# EAGLE board Schematic1_projectTSC v38 (EAGLE 9.7.0)
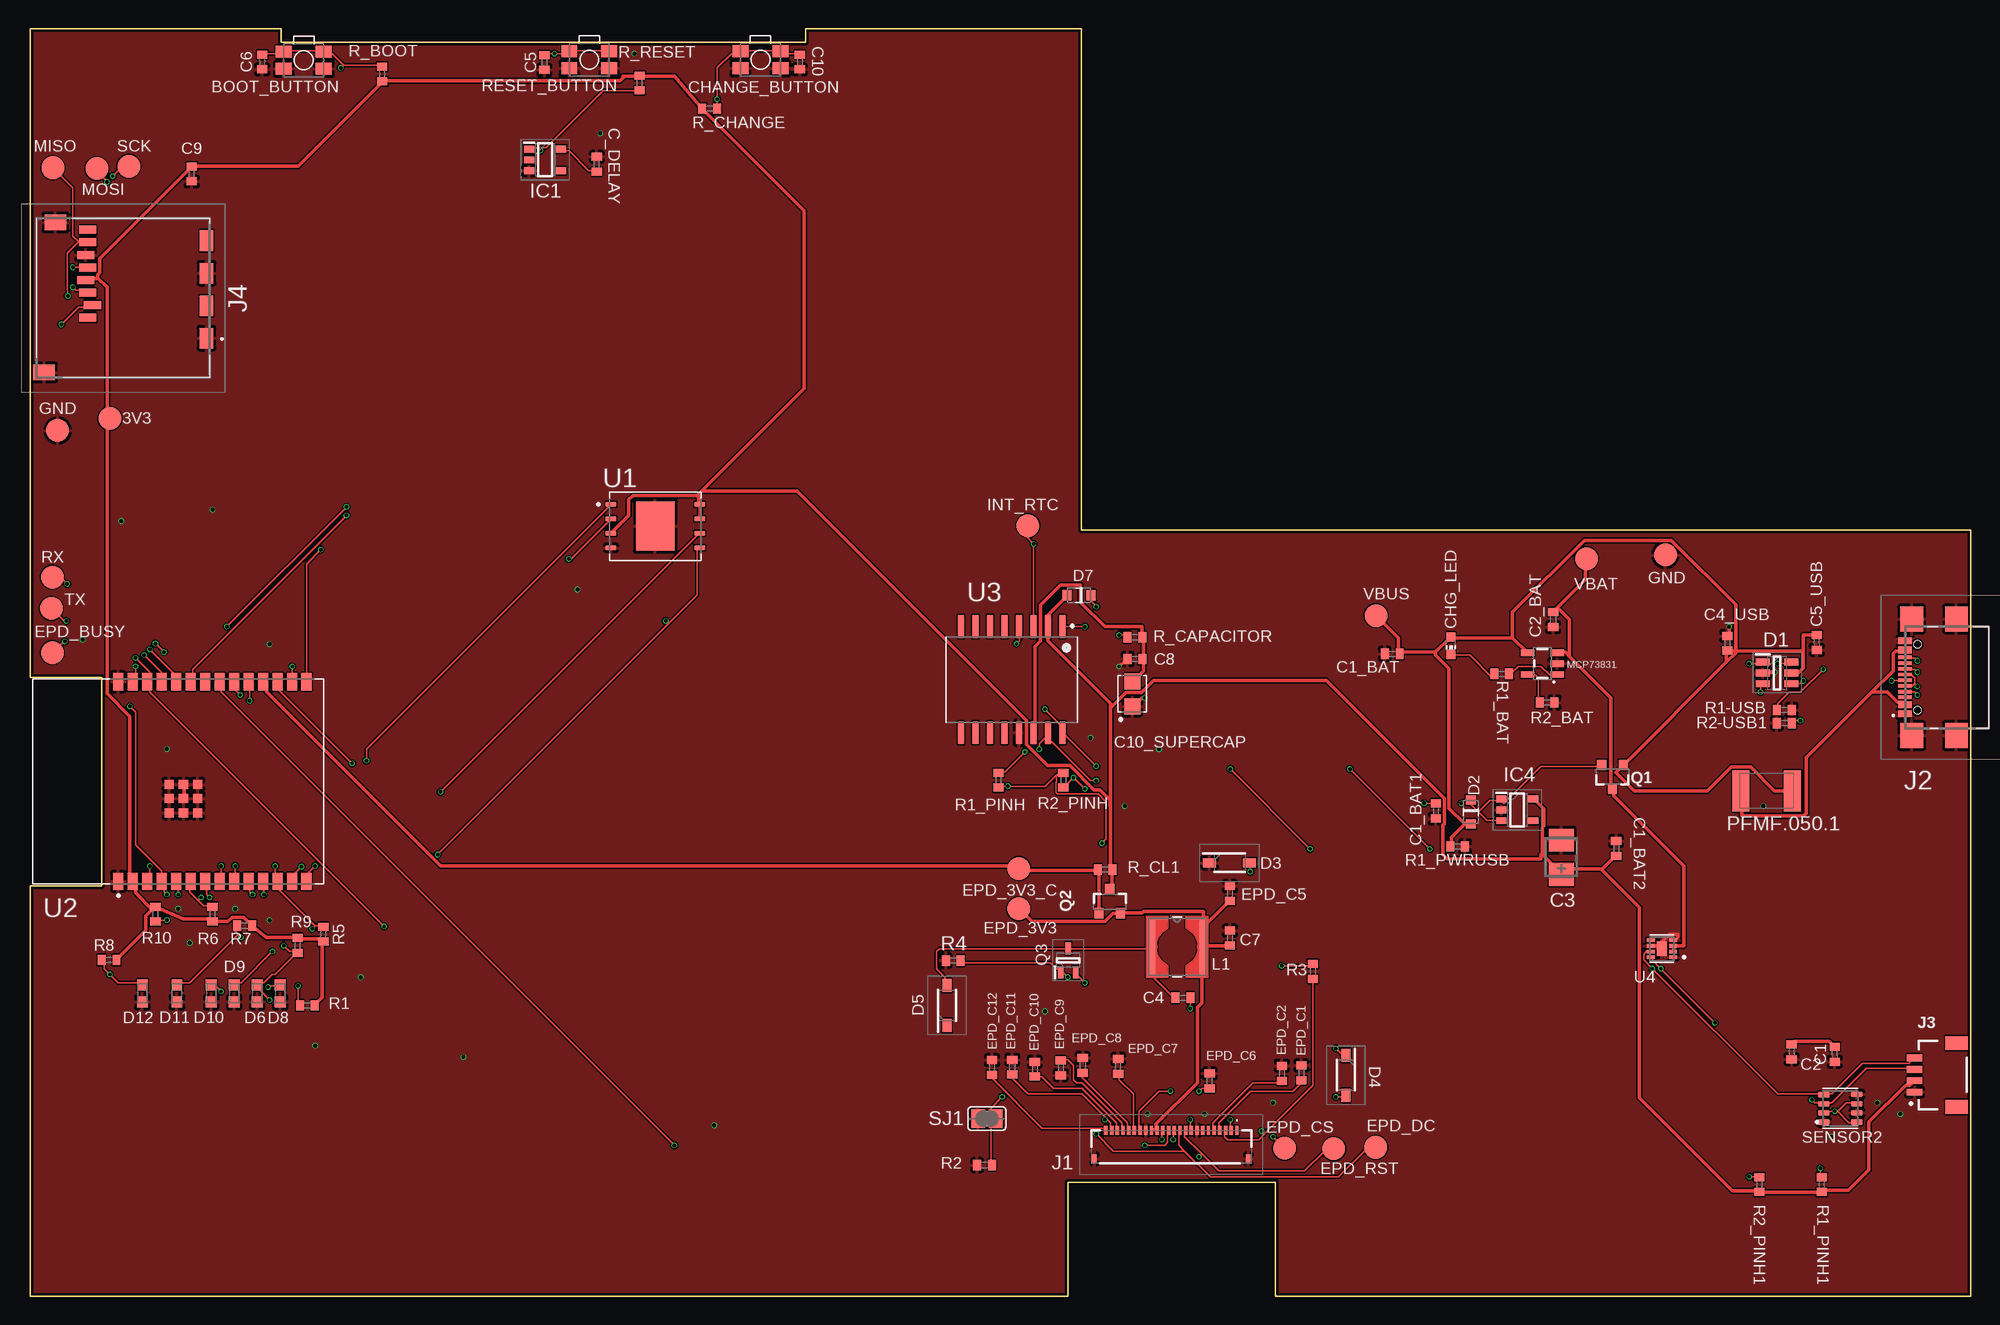
[diagram p0: board, top side]
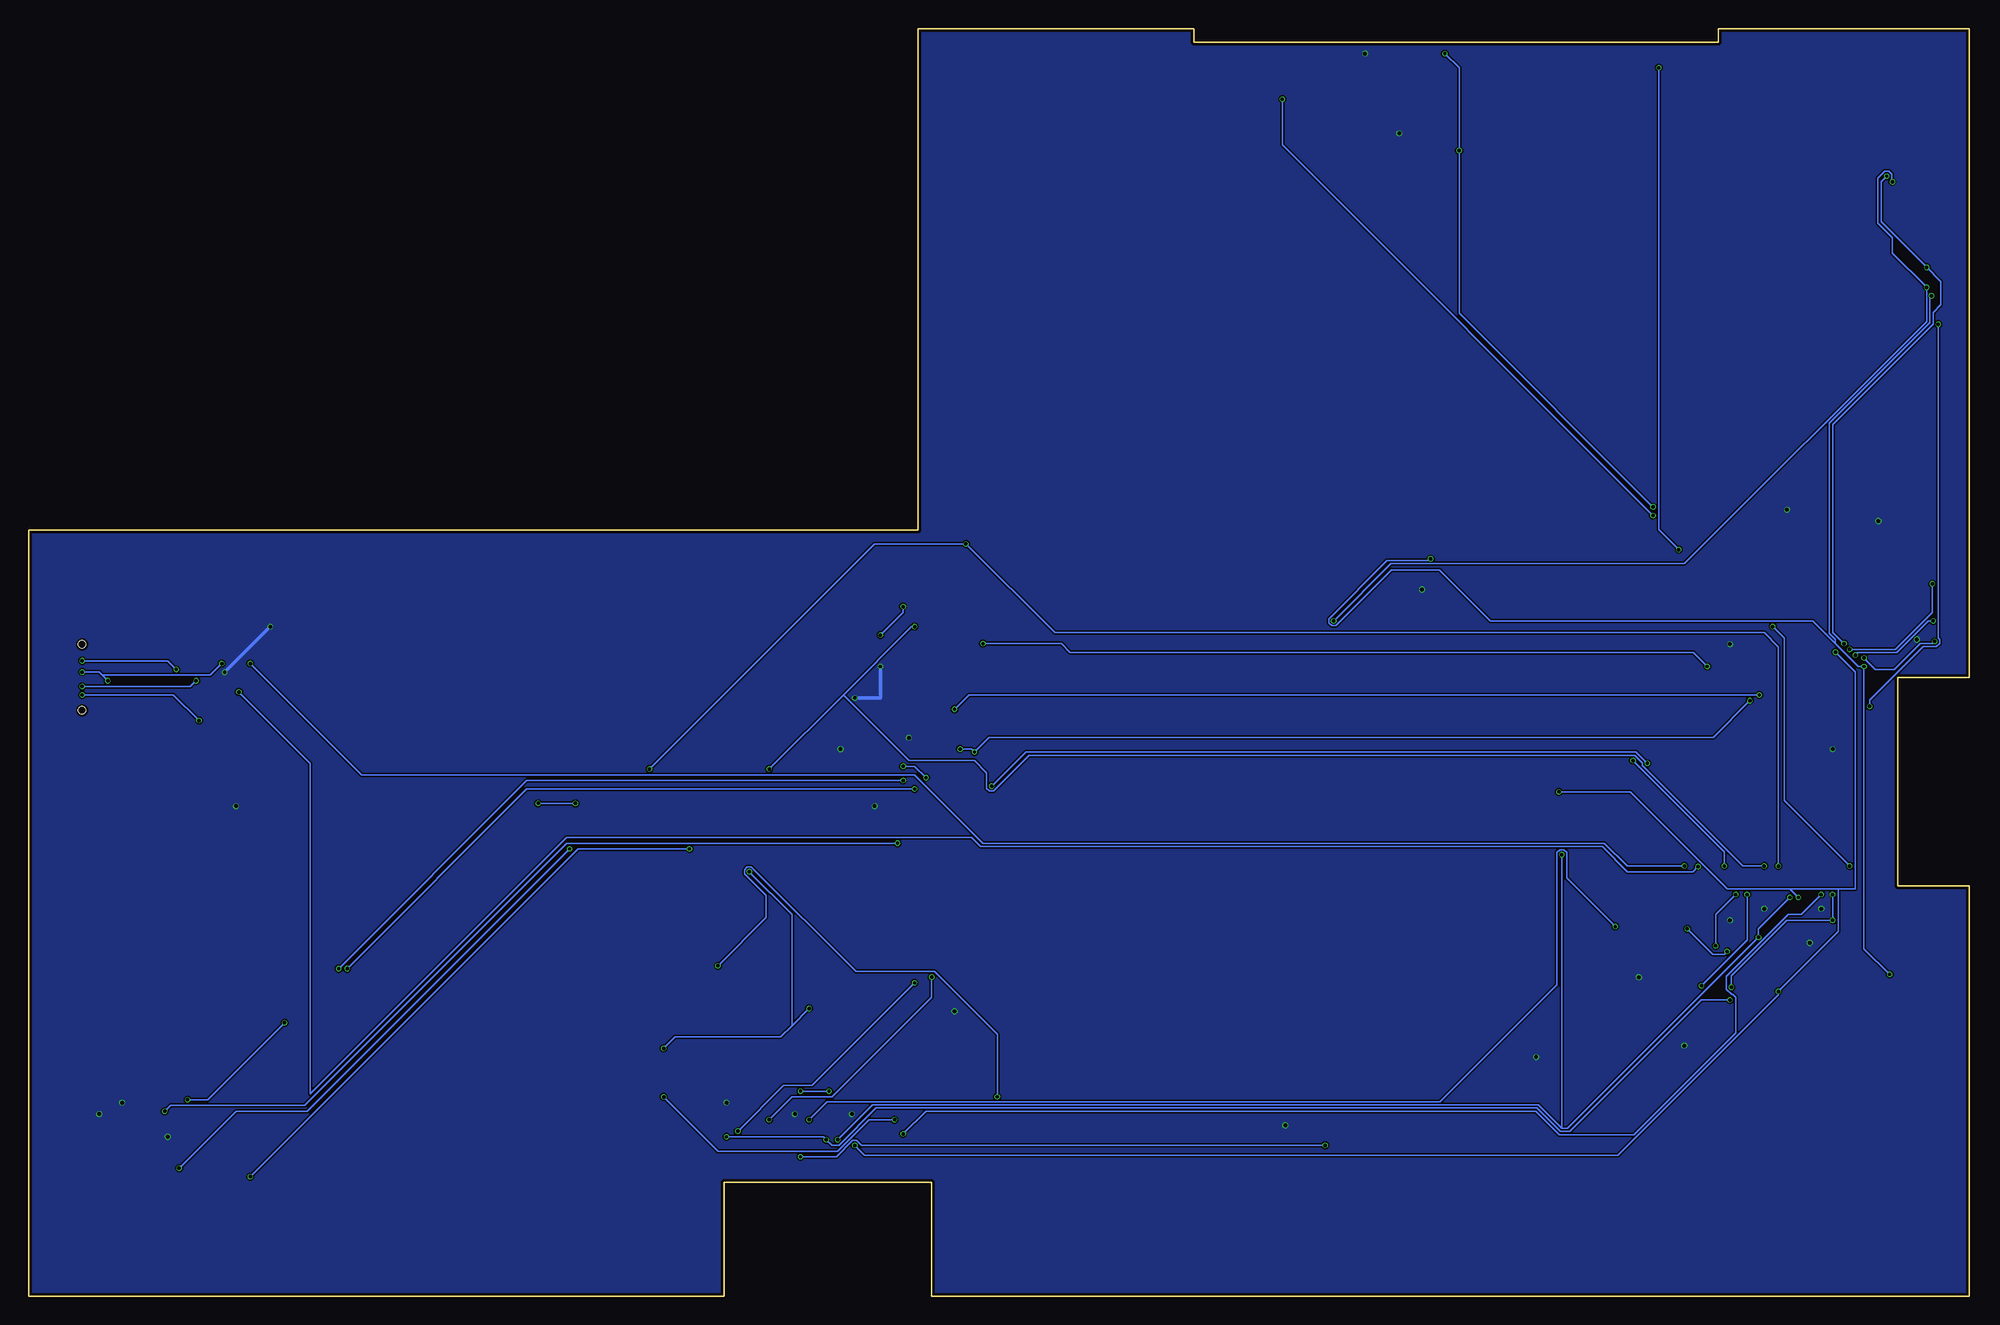
[diagram p1: board, bottom side, seen from below]

Size 170.2 x 111.2 mm. Coordinates in mm from the lower left corner, seen from the top.
Outline: 0,36 0,0 91,0 91,10 109.2,10 109.2,0 170.2,0 170.2,67.2 92.2,67.2 92.2,111.2 68,111.2 68,110 22.04,110 22.04,111.2 0,111.2 0,54.29 6.28,54.29 6.28,36 0,36
Copper layers (1*16): Top 0.035mm / dielectric 1.6mm / Bottom 0.035mm
Design rules "jlcpcb-2layers *": minimum track width 0.15mm, minimum drill 0.3mm, track to track 5mil, track to pad 5mil, pad to pad 5mil, via to via 5mil, smd to smd 5mil, copper to edge 0.2mm, drill to drill 6mil, minimum pad ring 10mil, minimum via ring 3mil, stop-mask expansion 4mil, vias tented up to drill 0mil, thermal gap 10mil
Net classes: 1 PWR: width 0.3 mm

## Footprints (pad centres in the part's own frame; a part is rotated, then mirrored left to right if it is on the bottom)
MYBUTTON = smd 1.4 x 1.05: 1 1.75,0.75; 2 -1.75,0.75; 3 -1.75,-0.75; 4 1.75,-0.75
EAGLE-LTSPICE_C0402 = smd 0.7 x 0.9: 1 -0.65,0; 2 0.65,0
RCL_CT3528 = smd 2 x 2.2: + -1.5,0; - 1.5,0
CAPCP3225X100N = smd 1.4 x 1.4: 1 -1.1,0; 2 1.1,0
ADAFRUIT_CHIP-LED0603 = smd 0.8 x 0.8: A 0,-0.75; C 0,0.75
SOT95P280X145-6N = smd 1.2 x 0.6: 1 -1.25,0.95; 2 -1.25,0; 3 -1.25,-0.95; 4 1.25,-0.95; 5 1.25,0; 6 1.25,0.95
ESP32_WROVER_AVX---SD0805S020S1R0_AVX_SD0805S020S1R0_0 = smd 0.8 x 0.9: 1 -1.05,0; 2 1.05,0
SOD3716X135N = smd 1.15 x 0.8: 1 -1.75,0; 2 1.75,0
DIOC1608X36N = smd 0.97 x 0.94: 1 -0.75,0; 2 0.75,0
SOT95P280X125-5N = smd 0.9 x 0.6: 1 -1.4,0.95; 2 -1.4,0; 3 -1.4,-0.95; 4 1.4,-0.95; 5 1.4,0.95
SOT95P280X120-5N = smd 0.9 x 0.6: 1 -1.4,0.95; 2 -1.4,0; 3 -1.4,-0.95; 4 1.4,-0.95; 5 1.4,0.95
FH34SRJ24S05SH99 = smd 0.3 x 0.8: 1 5.75,1.45; 2 5.25,1.45; 3 4.75,1.45; 4 4.25,1.45; 5 3.75,1.45; 6 3.25,1.45; 7 2.75,1.45; 8 2.25,1.45; 9 1.75,1.45; 10 1.25,1.45; 11 0.75,1.45; 12 0.25,1.45; 13 -0.25,1.45; 14 -0.75,1.45; 15 -1.25,1.45; 16 -1.75,1.45; 17 -2.25,1.45; 18 -2.75,1.45; 19 -3.25,1.45; 20 -3.75,1.45; 21 -4.25,1.45; 22 -4.75,1.45; 23 -5.25,1.45; 24 -5.75,1.45 | smd 0.4 x 0.8: MP1 6.75,-1.05; MP2 -6.75,-1.05
SAMACSYS_PARTS_USB4110GFA = smd 0.3 x 1.15: A1 -3.35,3.678; A4 -2.55,3.678; A5 -1.25,3.678; A6 -0.25,3.678; A7 0.25,3.678; A8 1.25,3.678; A9 2.55,3.678; A12 3.35,3.678; B1 3.05,3.678; B4 2.25,3.678; B5 1.75,3.678; B6 0.75,3.678; B7 -0.75,3.678; B8 -1.75,3.678; B9 -2.25,3.678; B12 -3.05,3.678 | smd 2.18 x 2: MP1 -5.11,-0.827; MP2 5.11,-0.827; MP3 -5.11,3.103; MP4 5.11,3.103 | hole 0.65: -2.89,2.603; 2.89,2.603
JST04_1MM_RA = smd 0.6 x 1.35: 1 -1.5,0; 2 -0.5,0; 3 0.5,0; 4 1.5,0 | smd 1.2 x 2: NC1 2.8,-3.675; NC2 -2.8,-3.675
112ATAARR03ATTEND = smd 1.8 x 1.2: G1 10.6,10.4; G2 4.9,10.4; S1 7.75,10.4; S2 2.05,10.4 | smd 1.4 x 1.9: G3 13.6,-3.85; G4 0.45,-2.85 | smd 0.7 x 1.5: P1 8.8,0; P2 7.7,0.4; P3 6.6,0; P4 5.5,-0.2; P5 4.4,0; P6 3.3,-0.2; P7 2.2,0; P8 1.1,0
IND_4828-WE-TPC_WRE = smd 0.635 x 4.826: 1 -2.286,0; 2 2.286,0
ESP32_WROVER_SPARKFUN-IC-POWER_SOT23-5 = smd 0.55 x 1.2: 1 -0.95,-1.3; 2 0,-1.3; 3 0.95,-1.3; 4 0.95,1.3; 5 -0.95,1.3
ESP32C6_VARISTOR_CT/CN1812 = smd 1.5 x 3.6: 1 -2.25,0; 2 2.25,0
ESP32_WROVER_SPARKFUN-DISCRETESEMI_SOT23-3 = smd 0.8 x 0.9: 1 -0.95,-1; 2 0.95,-1; 3 0,1.1
SOT65P210X110-3N = smd 1.05 x 0.5: 1 -1.05,0.65; 2 -1.05,-0.65; 3 1.05,0
ESP32_WROVER_EAGLE-LTSPICE_R0402 = smd 0.7 x 0.9: 1 -0.65,0; 2 0.65,0
ESP32_WROVER_BME680_PSON80P300X300X100-8N = smd 1.016 x 0.5: 1 1.458,1.2; 2 1.458,0.4; 3 1.458,-0.4; 4 1.458,-1.2; 5 -1.458,-1.22; 6 -1.458,-0.4; 7 -1.458,0.4; 8 -1.458,1.2
SJ = smd 1.168 x 1.6: 1 -0.762,0; 2 0.762,0
TP20R = smd 2 x 2: TP 0,0
SON127P600X800X80-9N = smd 0.94 x 0.44: 1 -3.895,1.905; 2 -3.895,0.635; 3 -3.895,-0.635; 4 -3.895,-1.905; 5 3.895,-1.905; 6 3.895,-0.635; 7 3.895,0.635; 8 3.895,1.905 | smd 3.4 x 4.3: 9 0,0
XCVR_ESP32-C6-WROOM-1-N8 = smd 1.5 x 0.9: 1 -8.75,5.26; 2 -8.75,3.99; 3 -8.75,2.72; 4 -8.75,1.45; 5 -8.75,0.18; 6 -8.75,-1.09; 7 -8.75,-2.36; 8 -8.75,-3.63; 9 -8.75,-4.9; 10 -8.75,-6.17; 11 -8.75,-7.44; 12 -8.75,-8.71; 13 -8.75,-9.98; 14 -8.75,-11.25; 15 8.75,-11.25; 16 8.75,-9.98; 17 8.75,-8.71; 18 8.75,-7.44; 19 8.75,-6.17; 20 8.75,-4.9; 21 8.75,-3.63; 22 8.75,-2.36; 23 8.75,-1.09; 24 8.75,0.18; 25 8.75,1.45; 26 8.75,2.72; 27 8.75,3.99; 28 8.75,5.26 | smd 0.8 x 0.8: 29_1 -2.755,0.79; 29_2 -1.505,0.79; 29_3 -0.255,0.79; 29_4 -2.755,-0.46; 29_5 -1.505,-0.46; 29_6 -0.255,-0.46; 29_7 -2.755,-1.71; 29_8 -1.505,-1.71; 29_9 -0.255,-1.71
SOIC127P1032X265-16N = smd 2.05 x 0.59: 1 -4.655,4.445; 2 -4.655,3.175; 3 -4.655,1.905; 4 -4.655,0.635; 5 -4.655,-0.635; 6 -4.655,-1.905; 7 -4.655,-3.175; 8 -4.655,-4.445; 9 4.655,-4.445; 10 4.655,-3.175; 11 4.655,-1.905; 12 4.655,-0.635; 13 4.655,0.635; 14 4.655,1.905; 15 4.655,3.175; 16 4.655,4.445
SON50P200X200X80-9N = smd 0.76 x 0.31: 1 -0.985,0.75; 2 -0.985,0.25; 3 -0.985,-0.25; 4 -0.985,-0.75; 8 0.985,0.75 | smd 0.762 x 0.31: 5 0.985,-0.75; 6 0.985,-0.25; 7 0.985,0.25 | smd 0.9 x 1.3: 9 0,0

## Placement (x,y rotation side)
BOOT_BUTTON  BUTTON_CUSYOMV1  [MYBUTTON]  24,108.41 180 top
C1  100nF  [EAGLE-LTSPICE_C0402]  158.26,21.25 270 top
C1_BAT  4.7uF  [EAGLE-LTSPICE_C0402]  119.45,56.36 180 top
C1_BAT1  4.7uF  [EAGLE-LTSPICE_C0402]  123.28,42.57 270 top
C1_BAT2  4.7uF  [EAGLE-LTSPICE_C0402]  139.09,39.28 90 top
C2  100nF  [EAGLE-LTSPICE_C0402]  154.47,21.46 270 top
C2_BAT  4.7uF  [EAGLE-LTSPICE_C0402]  133.56,59.36 270 top
C3  100uF  [RCL_CT3528]  134.26,38.52 90 top
C4  4.7uF/25V  [EAGLE-LTSPICE_C0402]  101.09,26.2 180 top
C4_USB  100nF  [EAGLE-LTSPICE_C0402]  148.83,57.28 90 top
C5  1uF  [EAGLE-LTSPICE_C0402]  45.11,108.22 270 top
C5_USB  4.7uF  [EAGLE-LTSPICE_C0402]  156.68,57.36 270 top
C6  100nF  [EAGLE-LTSPICE_C0402]  20.36,108.26 270 top
C7  10uF  [EAGLE-LTSPICE_C0402]  105.21,31.44 90 top
C8  100nF  [EAGLE-LTSPICE_C0402]  96.88,55.9 0 top
C9  100nF  [EAGLE-LTSPICE_C0402]  14.18,98.44 270 top
C10  100nF  [EAGLE-LTSPICE_C0402]  67.5,108.26 270 top
C10_SUPERCAP  CPH3225A  [CAPCP3225X100N]  96.66,52.85 90 top
C_DELAY  100nF  [EAGLE-LTSPICE_C0402]  49.7,99.31 90 top
CHANGE_BUTTON  BUTTON_CUSYOMV1  [MYBUTTON]  64.05,108.45 180 top
CHG_LED  [ADAFRUIT_CHIP-LED0603]  124.6,57.07 180 top
D1  USBLC6-2SC6Y  [SOT95P280X145-6N]  153.2,54.68 0 top
D2  ESP32_WROVER_AVX---SD0805S020S1R0_AVX_SD0805S020S1R0_0_0AVX_SD0805S020S1R0_0_0  [ESP32_WROVER_AVX---SD0805S020S1R0_AVX_SD0805S020S1R0_0]  126.34,42.49 270 top
D3  MBR0530  [SOD3716X135N]  105.18,38.03 0 top
D4  MBR0530  [SOD3716X135N]  115.39,19.4 270 top
D5  MBR0530  [SOD3716X135N]  80.41,25.52 90 top
D6  PGB1010603MR  [DIOC1608X36N]  19.93,26.57 90 top
D7  ESP32_WROVER_AVX---SD0805S020S1R0_AVX_SD0805S020S1R0_0_0AVX_SD0805S020S1R0_0_0  [ESP32_WROVER_AVX---SD0805S020S1R0_AVX_SD0805S020S1R0_0]  91.99,61.49 180 top
D8  PGB1010603MR  [DIOC1608X36N]  21.94,26.57 90 top
D9  PGB1010603MR  [DIOC1608X36N]  17.91,26.57 90 top
D10  PGB1010603MR  [DIOC1608X36N]  15.89,26.57 90 top
D11  PGB1010603MR  [DIOC1608X36N]  12.88,26.57 90 top
D12  PGB1010603MR  [DIOC1608X36N]  9.86,26.57 90 top
EPD_C1  1uF/50V  [EAGLE-LTSPICE_C0402]  111.48,19.61 270 top
EPD_C2  1uF/50V  [EAGLE-LTSPICE_C0402]  109.77,19.58 270 top
EPD_C5  0.1uF/50V  [EAGLE-LTSPICE_C0402]  105.21,35.34 270 top
EPD_C6  1uF/50V  [EAGLE-LTSPICE_C0402]  103.44,18.91 270 top
EPD_C7  1uF/50V  [EAGLE-LTSPICE_C0402]  95.42,20.18 270 top
EPD_C8  1uF/50V  [EAGLE-LTSPICE_C0402]  92.31,20.26 270 top
EPD_C9  1uF/50V  [EAGLE-LTSPICE_C0402]  90.39,20.05 90 top
EPD_C10  1uF/50V  [EAGLE-LTSPICE_C0402]  88.11,19.95 270 top
EPD_C11  1uF/50V  [EAGLE-LTSPICE_C0402]  86.13,20.12 270 top
EPD_C12  1uF/50V  [EAGLE-LTSPICE_C0402]  84.35,20.1 270 top
IC1  BD5229G-TR  [SOT95P280X125-5N]  45.17,99.68 0 top
IC4  XC6220A331MR-G  [SOT95P280X120-5N]  130.41,42.68 0 top
J1  FH34SRJ-24S-0.5SH_99_  [FH34SRJ24S05SH99]  100.08,13.11 0 top
J2  SAMACSYS_PARTS_USB4110-GF-A  [SAMACSYS_PARTS_USB4110GFA]  168.1,54.3 90 top
J3  QWIIC_RIGHT_ANGLE  [JST04_1MM_RA]  165.25,19.43 90 top
J4  112A-TAAR-R03_ATTEND  [112ATAARR03ATTEND]  5.08,94.64 270 top
L1  744043680IND_4828-WE-TPC_WRE  [IND_4828-WE-TPC_WRE]  100.59,30.66 0 top
MCP73831  ESP32_WROVER_SPARKFUN-IC-POWER_MCP73831  [ESP32_WROVER_SPARKFUN-IC-POWER_SOT23-5]  132.61,55.5 90 top
PFMF.050.1  ESP32C6_VARISTORCN1812  [ESP32C6_VARISTOR_CT/CN1812]  152.28,44.34 0 top
Q1  20V/4.2A/52mΩ/1.4W  [ESP32_WROVER_SPARKFUN-DISCRETESEMI_SOT23-3]  138.76,45.61 180 top
Q2  20V/4.2A/52mΩ/1.4W  [ESP32_WROVER_SPARKFUN-DISCRETESEMI_SOT23-3]  94.68,34.61 0 top
Q3  SI1308EDL-T1-GE3  [SOT65P210X110-3N]  91.04,29.49 90 top
R1  10K  [ESP32_WROVER_EAGLE-LTSPICE_R0402]  24.33,25.52 0 top
R1-USB  5k1  [ESP32_WROVER_EAGLE-LTSPICE_R0402]  153.84,51.44 0 top
R1_BAT  200  [ESP32_WROVER_EAGLE-LTSPICE_R0402]  129.05,54.6 0 top
R1_PINH  10K  [ESP32_WROVER_EAGLE-LTSPICE_R0402]  84.93,45.28 90 top
R1_PINH1  10K  [ESP32_WROVER_EAGLE-LTSPICE_R0402]  157.12,9.82 90 top
R1_PWRUSB  100k  [ESP32_WROVER_EAGLE-LTSPICE_R0402]  125.18,39.47 180 top
R2  2.2  [ESP32_WROVER_EAGLE-LTSPICE_R0402]  83.69,11.52 0 top
R2-USB1  5k1  [ESP32_WROVER_EAGLE-LTSPICE_R0402]  153.84,50.28 0 top
R2_BAT  2K  [ESP32_WROVER_EAGLE-LTSPICE_R0402]  133.03,52.09 180 top
R2_PINH  10K  [ESP32_WROVER_EAGLE-LTSPICE_R0402]  90.61,45.28 270 top
R2_PINH1  10K  [ESP32_WROVER_EAGLE-LTSPICE_R0402]  151.63,9.82 90 top
R3  0.47  [ESP32_WROVER_EAGLE-LTSPICE_R0402]  112.49,28.52 270 top
R4  10K  [ESP32_WROVER_EAGLE-LTSPICE_R0402]  80.96,29.46 0 top
R5  10K  [ESP32_WROVER_EAGLE-LTSPICE_R0402]  25.72,31.78 90 top
R6  10K  [ESP32_WROVER_EAGLE-LTSPICE_R0402]  16,33.53 90 top
R7  10K  [ESP32_WROVER_EAGLE-LTSPICE_R0402]  18.83,32.52 180 top
R8  10K  [ESP32_WROVER_EAGLE-LTSPICE_R0402]  6.93,29.52 180 top
R9  10K  [ESP32_WROVER_EAGLE-LTSPICE_R0402]  23.47,30.78 270 top
R10  10K  [ESP32_WROVER_EAGLE-LTSPICE_R0402]  11,33.53 270 top
R_BOOT  10K  [ESP32_WROVER_EAGLE-LTSPICE_R0402]  30.88,107.22 90 top
R_CAPACITOR  15  [ESP32_WROVER_EAGLE-LTSPICE_R0402]  96.88,57.81 0 top
R_CHANGE  10K  [ESP32_WROVER_EAGLE-LTSPICE_R0402]  59.6,104.17 0 top
R_CL1  10K  [ESP32_WROVER_EAGLE-LTSPICE_R0402]  94.28,37.44 0 top
R_RESET  10K  [ESP32_WROVER_EAGLE-LTSPICE_R0402]  53.45,106.42 270 top
RESET_BUTTON  BUTTON_CUSYOMV1  [MYBUTTON]  49.04,108.45 180 top
SENSOR2  ESP32_WROVER_BME680_BME680  [ESP32_WROVER_BME680_PSON80P300X300X100-8N]  158.74,16.5 180 top
SJ1  [SJ]  83.91,15.6 0 top
TP1  TPTP20R  [TP20R]  1.87,60.34 0 top
TP2  TPTP20R  [TP20R]  1.96,63.08 0 top
TP3  TPTP20R  [TP20R]  136.49,64.7 0 top
TP4  TPTP20R  [TP20R]  2.41,75.95 0 top
TP5  TPTP20R  [TP20R]  143.41,65.03 0 top
TP6  TPTP20R  [TP20R]  2,98.99 0 top
TP7  TPTP20R  [TP20R]  5.86,98.93 0 top
TP8  TPTP20R  [TP20R]  8.67,99.11 0 top
TP9  TPTP20R  [TP20R]  1.96,56.47 0 top
TP10  TPTP20R  [TP20R]  110,13 0 top
TP11  TPTP20R  [TP20R]  118,13.08 0 top
TP12  TPTP20R  [TP20R]  114.32,12.95 0 top
TP13  TPTP20R  [TP20R]  86.72,37.52 0 top
TP14  TPTP20R  [TP20R]  118.04,59.7 0 top
TP15  TPTP20R  [TP20R]  87.49,67.6 0 top
TP16  TPTP20R  [TP20R]  7,77 0 top
TP17  TPTP20R  [TP20R]  86.69,34 0 top
U1  W25Q512JVEIQ  [SON127P600X800X80-9N]  54.83,67.56 0 top
U2  ESP32-C6-WROOM-1-N8  [XCVR_ESP32-C6-WROOM-1-N8]  13,45.17 90 top
U3  DS3231SN#  [SOIC127P1032X265-16N]  86.09,54.1 270 top
U4  MAX17048G+T10  [SON50P200X200X80-9N]  143.1,30.5 180 top

## Library data of the parts
BOOT_BUTTON CHANGE_BUTTON CHG_LED PFMF.050.1 RESET_BUTTON SJ1 TP1-TP17 = DeskAssistant v19 v1
C1 C1_BAT C1_BAT1 C1_BAT2 C2 C2_BAT C4 C4_USB C5 C5_USB C6-C10 C_DELAY EPD_C1 EPD_C2 EPD_C5-EPD_C12 = DeskAssistant v19 v1; SPICEMODEL: NONE; SPICEPREFIX: C
C3 = DeskAssistant v19 v1; SPICEPREFIX: C
C10_SUPERCAP = DeskAssistant v19 v1; AVAILABILITY: Not in stock; CHECK_PRICES: https://www.snapeda.com/parts/CPH3225A/Seiko+Instruments/view-part/?ref=eda; DESCRIPTION: 11 mF (EDLC) Supercapacitor 3.3 V 1210 (3225 Metric) - -; MF: Seiko Instruments; MP: CPH3225A; PACKAGE: 1210 Seiko; PRICE: None; PURCHASE-URL: https://www.snapeda.com/api/url_track_click_mouser/?unipart_id=562593&manufacturer=Seiko Instruments&part_name=CPH3225A&search_term=None; SNAPEDA_LINK: https://www.snapeda.com/parts/CPH3225A/Seiko+Instruments/view-part/?ref=snap
D1 = DeskAssistant v19 v1; AVAILABILITY: In Stock; CHECK_PRICES: https://www.snapeda.com/parts/USBLC6-2SC6Y/STMicroelectronics/view-part/?ref=eda; DESCRIPTION: 17V Clamp 5A (8/20µs) Ipp Tvs Diode Surface Mount SOT-23-6; MF: STMicroelectronics; MP: USBLC6-2SC6Y; PACKAGE: SOT-23-6 STMicroelectronics; PRICE: None; SNAPEDA_LINK: https://www.snapeda.com/parts/USBLC6-2SC6Y/STMicroelectronics/view-part/?ref=snap
D2 D7 = DeskAssistant v19 v1; CENTROID_NOT_SPECIFIED: No; DATASHEET: http://datasheets.avx.com/schottky.pdf; DIGIKEY_DESCRIPTION: DIODE SCHOTTKY 20V 1A 0805; DIGIKEY_PART_NUMBER: 478-7800-1-ND; LEAD_FREE: yes; MF: AVX; MOUSER_PART_NUMBER: 581-SD0805S020S1R0; PACKAGE: 0805 (2012 metric); PREFIX: D; ROHS: yes; TEMPERATURE_RANGE_HIGH: +125°C; TEMPERATURE_RANGE_LOW: -55°C
D3-D5 = DeskAssistant v19 v1; AVAILABILITY: In Stock; CHECK_PRICES: https://www.snapeda.com/parts/MBR0530/Onsemi/view-part/?ref=eda; DESCRIPTION: Diode Schottky 30 V 500mA Surface Mount SOD-123; MF: ON Semiconductor; MP: MBR0530; PACKAGE: SOD-123-2 ON Semiconductor; PRICE: None; PURCHASE-URL: https://www.snapeda.com/api/url_track_click_mouser/?unipart_id=179458&manufacturer=ON Semiconductor&part_name=MBR0530&search_term=None; SNAPEDA_LINK: https://www.snapeda.com/parts/MBR0530/Onsemi/view-part/?ref=snap
D6 D8-D12 = DeskAssistant v19 v1; AVAILABILITY: In Stock; CHECK_PRICES: https://www.snapeda.com/parts/PGB1010603MR/Littelfuse/view-part/?ref=eda; DESCRIPTION: 150V (Typ) Clamp - Ipp Tvs Diode Surface Mount 0603 (1608 Metric); MF: Littelfuse Inc.; MP: PGB1010603MR; PACKAGE: 0603 Littelfuse Inc.; PRICE: None; PURCHASE-URL: https://www.snapeda.com/api/url_track_click_mouser/?unipart_id=5659453&manufacturer=Littelfuse Inc.&part_name=PGB1010603MR&search_term=None; SNAPEDA_LINK: https://www.snapeda.com/parts/PGB1010603MR/Littelfuse/view-part/?ref=snap
IC1 = DeskAssistant v19 v1; DESCRIPTION: Voltage Detector with Adjustable Delay Time: CMOS processes are utilized to develop high precision, low current consumption CMOS reset ICs that allow arbitrary setting of the delay time. The extensive lineup includes both Nch Open Drain and CMOS output types in a wide range of detection voltages (from 2.3V to 6.0V, in 0.1V steps), enabling selection of the ideal solution based on customer requirements. In addition, the entire series is of course both lead-free and RoHS-compliant.; HEIGHT: 1.25mm; MANUFACTURER_NAME: ROHM Semiconductor; MANUFACTURER_PART_NUMBER: BD5229G-TR; MOUSER_PART_NUMBER: 755-BD5229G-TR; MOUSER_PRICE-STOCK: https://www.mouser.co.uk/ProductDetail/ROHM-Semiconductor/BD5229G-TR?qs=4kLU8WoGk0vvnhrrYwdszw%3D%3D
IC4 = DeskAssistant v19 v1; DESCRIPTION: LDO Voltage Regulators; HEIGHT: 1.2mm; MANUFACTURER_NAME: Torex; MANUFACTURER_PART_NUMBER: XC6220A331MR-G; MOUSER_PART_NUMBER: 865-XC6220A331MR-G; MOUSER_PRICE-STOCK: https://www.mouser.co.uk/ProductDetail/Torex-Semiconductor/XC6220A331MR-G?qs=AsjdqWjXhJ8ZSWznL1J0gg%3D%3D
J1 = DeskAssistant v19 v1; DESCRIPTION: 24 Position FFC, FPC Connector Contacts, Top and Bottom 0.020" (0.50mm) Surface Mount, Right Angle; HEIGHT: 1.1mm; MANUFACTURER_NAME: Hirose; MANUFACTURER_PART_NUMBER: FH34SRJ-24S-0.5SH(99); MOUSER_PART_NUMBER: 798-FH34SRJ24S05SH99; MOUSER_PRICE-STOCK: https://www.mouser.co.uk/ProductDetail/Hirose-Connector/FH34SRJ-24S-0.5SH99?qs=vcbW%252B4%252BSTIpKBl5ap9J8Fw%3D%3D
J2 = DeskAssistant v19 v1; DESCRIPTION: CONN USB 2.0 TYPE-C R/A SMT; HEIGHT: 3.26mm; MANUFACTURER_NAME: GCT (GLOBAL CONNECTOR TECHNOLOGY); MANUFACTURER_PART_NUMBER: USB4110-GF-A; MOUSER_PART_NUMBER: 640-USB4110-GF-A; MOUSER_PRICE-STOCK: https://www.mouser.co.uk/ProductDetail/GCT/USB4110-GF-A?qs=KUoIvG%2F9IlYiZvIXQjyJeA%3D%3D
J3 = DeskAssistant v19 v1; PROD_ID: CONN-13694
J4 = DeskAssistant v19 v1; DESCRIPTION: Micro SD Card Socket, Push-Push Type, Top Mount, SMT, H=1.83mm, 10u; HEIGHT: 1.9mm; MANUFACTURER_NAME: ATTEND; MANUFACTURER_PART_NUMBER: 112A-TAAR-R03 ATTEND
L1 = DeskAssistant v19 v1; COPYRIGHT: Copyright (C) 2024 Ultra Librarian. All rights reserved.; MANUFACTURER_PART_NUMBER: 68uH; MFR_NAME: Wurth Electronics
MCP73831 = DeskAssistant v19 v1; PROD_ID: IC-09995
Q1 = DeskAssistant v19 v1; PROD_ID: TRAN-14388
Q2 = DeskAssistant v19 v1; PRODUCT: DMG2305UX-7; PROD_ID: TRAN-14388
Q3 = DeskAssistant v19 v1; AVAILABILITY: In Stock; CHECK_PRICES: https://www.snapeda.com/parts/SI1308EDL-T1-GE3/Vishay+Siliconix/view-part/?ref=eda; DESCRIPTION: Si1308EDL-T1-GE3 N-channel MOSFET Transistor, 1.5 A, 30 V, 3-Pin SC-70 | Siliconix / Vishay SI1308EDL-T1-GE3; MF: Vishay Siliconix; MP: SI1308EDL-T1-GE3; PACKAGE: SOT-323 Vishay Semiconductor; PRICE: None; PURCHASE-URL: https://www.snapeda.com/api/url_track_click_mouser/?unipart_id=274603&manufacturer=Vishay Siliconix&part_name=SI1308EDL-T1-GE3&search_term=None; SNAPEDA_LINK: https://www.snapeda.com/parts/SI1308EDL-T1-GE3/Vishay+Siliconix/view-part/?ref=snap
R1 R1-USB R1_BAT R1_PINH R1_PINH1 R1_PWRUSB R2 R2-USB1 R2_BAT R2_PINH R2_PINH1 R3-R10 R_BOOT R_CAPACITOR R_CHANGE R_CL1 R_RESET = DeskAssistant v19 v1; SPICEMODEL: NONE; SPICEPREFIX: R
SENSOR2 = DeskAssistant v19 v1; AVAILABILITY: Unavailable; DESCRIPTION: Integrated Environmental Unit; MF: Bosch Sensortec; MP: BME680; PACKAGE: LGA-8 Bosch Tools; PRICE: None
U1 = DeskAssistant v19 v1; AVAILABILITY: In Stock; CHECK_PRICES: https://www.snapeda.com/parts/W25Q512JVEIQ/Winbond+Electronics/view-part/?ref=eda; DESCRIPTION: FLASH - NOR Memory IC 512Mb (64M x 8) SPI - Quad I/O 133 MHz 8-WSON (8x6); MF: Winbond Electronics; MP: W25Q512JVEIQ; PACKAGE: Package; PRICE: None; SNAPEDA_LINK: https://www.snapeda.com/parts/W25Q512JVEIQ/Winbond+Electronics/view-part/?ref=snap
U2 = DeskAssistant v19 v1; AVAILABILITY: In Stock; CHECK_PRICES: https://www.snapeda.com/parts/ESP32-C6-WROOM-1-N8/Espressif+Systems/view-part/?ref=eda; DESCRIPTION: Multiprotocol Modules ESP32-C6 module, Wi-Fi 6 in 2.4 GHz band, Bluetooth 5, Zigbee 3.0 and Thread. ESP34-WROOM Compatible - ENGINEERING SAMPLE; MF: Espressif Systems; MP: ESP32-C6-WROOM-1-N8; PACKAGE: None; PRICE: None; SNAPEDA_LINK: https://www.snapeda.com/parts/ESP32-C6-WROOM-1-N8/Espressif+Systems/view-part/?ref=snap
U3 = DeskAssistant v19 v1; AVAILABILITY: In Stock; CHECK_PRICES: https://www.snapeda.com/parts/DS3231SN%23/Analog+Devices/view-part/?ref=eda; DESCRIPTION: Extremely Accurate I²C-Integrated RTC/TCXO/Crystal; MF: Analog Devices; MP: DS3231SN#; PACKAGE: SOIC-16 Maxim; PRICE: None; PURCHASE-URL: https://www.snapeda.com/api/url_track_click_mouser/?unipart_id=99048&manufacturer=Analog Devices&part_name=DS3231SN#&search_term=None; SNAPEDA_LINK: https://www.snapeda.com/parts/DS3231SN%23/Analog+Devices/view-part/?ref=snap
U4 = DeskAssistant v19 v1; AVAILABILITY: In Stock; CHECK_PRICES: https://www.snapeda.com/parts/MAX17048G+T10/Analog+Devices/view-part/?ref=eda; DESCRIPTION: 3µA 1-Cell/2-Cell Fuel Gauge with ModelGauge; MF: Analog Devices; MP: MAX17048G+T10; PACKAGE: TDFN-8 Maxim; PRICE: None; PURCHASE-URL: https://www.snapeda.com/api/url_track_click_mouser/?unipart_id=329239&manufacturer=Analog Devices&part_name=MAX17048G+T10&search_term=None; SNAPEDA_LINK: https://www.snapeda.com/parts/MAX17048G+T10/Analog+Devices/view-part/?ref=snap

## Nets
3V3 [PWR]: C1_BAT2.1 C3.+ C9.1 D7.2 IC4.5 J3.2 J4.P4 Q2.3 R1.2 R1_PINH1.1 R2_PINH1.1 R5.1 R6.1 R7.1 R8.1 R9.1 R10.1 R_BOOT.1 R_CHANGE.1 R_CL1.2 R_RESET.1 TP16.TP U1.3 U1.7 U1.8 U2.2 U3.2
32KHZ [NORMAL]: R2_PINH1.2 U2.9 U3.1
DN [NORMAL]: D1.4 J2.A7 J2.B7
DP [NORMAL]: D1.6 J2.A6 J2.B6
EPD_3V3 [PWR]: C7.1 EPD_C5.2 J1.15 J1.16 L1.2 Q2.2 TP17.TP
EPD_3V3_C [PWR]: Q2.1 R_CL1.1 TP13.TP U2.18
EPD_BUSY [NORMAL]: J1.9 TP9.TP U2.26
EPD_CS [NORMAL]: D6.2 J1.12 R9.2 TP10.TP U2.11
EPD_DC [NORMAL]: J1.11 TP11.TP U2.5
EPD_RST [NORMAL]: J1.10 TP12.TP U2.21
FLASH_CS [NORMAL]: D9.2 R5.2 U1.1 U2.12
GDR [NORMAL]: J1.2 Q3.1 R4.2
GND [PWR]: BOOT_BUTTON.1 BOOT_BUTTON.2 C1.2 C1_BAT1.2 C1_BAT2.2 C1_BAT.2 C2.2 C2_BAT.2 C3.- C4_USB.2 C5.2 C5_USB.2 C6.2 C7.2 C8.1 C9.2 C10.2 C10_SUPERCAP.1 C_DELAY.2 CHANGE_BUTTON.1 CHANGE_BUTTON.2 D1.2 D3.1 D6.1 D8.1 D9.1 D10.1 D11.1 D12.1 EPD_C1.1 EPD_C2.1 EPD_C5.1 EPD_C6.1 EPD_C7.1 EPD_C8.1 EPD_C9.1 EPD_C10.1 EPD_C11.1 EPD_C12.1 IC1.3 IC4.2 J1.8 J1.17 J1.MP1 J1.MP2 J2.A1 J2.A12 J2.B1 J2.B12 J2.MP1 J2.MP2 J2.MP3 J2.MP4 J3.1 J4.G1 J4.G2 J4.G3 J4.G4 J4.P6 MCP73831.2 R1-USB.2 R1_PWRUSB.1 R2-USB1.1 R2.1 R2_BAT.1 R4.1 RESET_BUTTON.1 RESET_BUTTON.2 SENSOR2.1 SENSOR2.5 SENSOR2.7 SJ1.1 TP4.TP TP5.TP U1.4 U1.9 U2.1 U2.28 U2.29_1 U2.29_2 U2.29_3 U2.29_4 U2.29_5 U2.29_6 U2.29_7 U2.29_8 U2.29_9 U3.13 U4.1 U4.4 U4.6 U4.9
GPIO8 [NORMAL]: R1.1 U2.10
I2C_PW [NORMAL]: R1_PINH.1 R2_PINH.1 SENSOR2.2 SENSOR2.6 SENSOR2.8 U2.17
INT_RTC [NORMAL]: R1_PINH1.2 TP15.TP U2.8 U3.3
IO/BOOT [NORMAL]: BOOT_BUTTON.3 BOOT_BUTTON.4 C6.1 R_BOOT.2 U2.15
IO/CHANGE [NORMAL]: C10.1 CHANGE_BUTTON.3 CHANGE_BUTTON.4 R_CHANGE.2 U2.23
MISO [NORMAL]: D12.2 J4.P7 R8.2 TP6.TP U1.2 U2.27
MOSI [NORMAL]: D11.2 J1.14 J4.P3 R7.2 TP7.TP U1.5 U2.7
N$1 [NORMAL]: J2.A5 R2-USB1.2
N$2 [NORMAL]: J2.B5 R1-USB.1
N$3 [NORMAL]: MCP73831.1 R1_BAT.2
N$4 [NORMAL]: C1_BAT1.1 D2.1 IC4.1 IC4.3 Q1.2
N$5 [NORMAL]: CHG_LED.C R1_BAT.1
N$6 [NORMAL]: C4.1 D3.2 D4.1
N$7 [NORMAL]: MCP73831.5 R2_BAT.2
N$8 [NORMAL]: EPD_C2.2 J1.5
N$9 [NORMAL]: EPD_C8.2 J1.20
N$10 [NORMAL]: EPD_C12.2 J1.24
N$11 [NORMAL]: EPD_C1.2 J1.4
N$12 [NORMAL]: EPD_C10.2 J1.22
N$13 [NORMAL]: C_DELAY.1 IC1.5
N$14 [NORMAL]: D7.1 R_CAPACITOR.1
N$15 [NORMAL]: EPD_C9.2 J1.21
N$19 [NORMAL]: EPD_C7.2 J1.19
N$20 [NORMAL]: EPD_C6.2 J1.18
PREVGH [NORMAL]: D5.1
PREVGL [NORMAL]: D4.2 EPD_C11.2 J1.23
RESE [NORMAL]: J1.3 Q3.2 R3.2
RESE' [NORMAL]: R2.2 R3.1 SJ1.2
RESET [NORMAL]: C5.1 IC1.1 R_RESET.2 RESET_BUTTON.3 RESET_BUTTON.4 U2.3
RTC_RST [NORMAL]: U2.16 U3.4
RX [NORMAL]: TP2.TP U2.24
SCK [NORMAL]: D10.2 J1.13 J4.P5 R6.2 TP8.TP U1.6 U2.6
SCL [NORMAL]: J3.4 R2_PINH.2 SENSOR2.4 U2.20 U3.16 U4.7
SDA [NORMAL]: J3.3 R1_PINH.2 SENSOR2.3 U2.19 U3.15 U4.8
SRC [NORMAL]: C4.2 D5.2 L1.1 Q3.3
SS_SD [NORMAL]: D8.2 J4.P2 R10.2 U2.4
TX [NORMAL]: TP1.TP U2.25
USB_D+ [NORMAL]: D1.1 U2.14
USB_D- [NORMAL]: D1.3 U2.13
VBAT [PWR]: C2_BAT.1 MCP73831.3 Q1.3 TP3.TP U4.2 U4.3
VBUS [PWR]: C1_BAT.1 C4_USB.1 C5_USB.1 CHG_LED.A D1.5 D2.2 MCP73831.4 PFMF.050.1.2 Q1.1 R1_PWRUSB.2 TP14.TP
VBUS1 [PWR]: C1.1 C2.1
VRTC [PWR]: C8.2 C10_SUPERCAP.2 R_CAPACITOR.2 U3.14
VUSB [PWR]: J2.A4 J2.A9 J2.B4 J2.B9 PFMF.050.1.1

## Tracks (layer width: path | path; a pad name or v marks a point on that pad's centre or on a via)
3V3
  Top 0.3: Q2.3 94.75,35.75 94.88,35.88 94.88,37.38 R_CL1.2 94.88,37.5 94.75,37.62 94.75,43 | D7.2 90.88,61.38 89.25,59.75 89.25,58.88 U3.2 89.25,58.62 89.25,57.5 94.75,52 94.75,51.63 | 132.62,38.75 132.62,41.12 132.75,41.25 132.75,42.75 131.88,43.62 IC4.5 | 132.62,38.75 134.25,37.12 C3.+ 134,37.5 137.88,37.5 | 137.88,37.5 139,38.62 C1_BAT2.1 | 137.88,37.5 137.88,37.38 141.12,34.12 141.12,17.41 149.27,9.27 151.53,9.27 R2_PINH1.1 151.75,9.12 157,9.12 R1_PINH1.1 157.25,9.12 157.44,9.31 159.44,9.31 161.25,11.12 161.25,15.3 164.46,18.51 164.83,18.51 J3.2 | 132.62,38.75 132.5,38.75 132.5,38.38 124.25,38.38 123.9,38.72 123.9,41.35 124.01,41.46 124.01,43.69 113.69,54 98.5,54 97.47,52.97 96.09,52.97 94.75,51.63 | R8.1 7.62,29.62 10.12,32.12 10.12,33.38 11,34.25 R10.1 | R10.1 10.62,34 9.25,35.38 9.25,36.25 9.12,36.38 U2.2 9,36.5 8.75,36.75 8.75,50.88 6.75,52.88 6.75,77.12 TP16.TP 6.75,77.25 6.75,88.5 5.94,89.31 | R1.2 25,25.62 25.62,26.25 25.62,31.12 R5.1 25.5,31.12 25.5,31.38 23.5,31.38 R9.1 23.38,31.5 20.7,31.5 R7.1 18.75,33.25 17.71,33.25 17.34,32.88 16.12,32.88 R6.1 15.88,32.88 15.62,33.12 13.45,33.12 R10.1 | 58.62,70.25 52.88,70.25 52.5,69.88 52.5,68.5 51,67 U1.3 | 58.62,70.25 58.62,69.5 U1.8 58.75,69.38 58.75,68.25 U1.7 | 5.94,89.31 5.88,89.25 4.88,89.25 J4.P4 | 58.88,70.62 67.88,79.62 67.88,95.24 R_CHANGE.1 56.52,107 53.5,107 R_RESET.1 53.38,107 52,107 52,106.88 51.75,106.62 31,106.62 R_BOOT.1 30.88,106.5 23.5,99.12 14.25,99.12 C9.1 6.1,91.01 6.1,89.78 5.94,89.61 5.94,89.31 | 58.88,70.62 58.62,70.38 58.62,70.25 | 58.88,70.62 67.25,70.62 87.38,50.5 87.38,48.4 89.21,46.56 91.17,46.56 93.3,44.43 93.82,44.43 94.71,43.53 94.71,43.04 94.75,43
  Top 0.3: 94.75,51.63 94.75,43
32KHZ  (via drill 0.3)
  Top 0.15: v150.75,10.5 151.5,10.5 R2_PINH1.2 | v105.25,46.25 v112.25,39.25 | v92.5,58.75 90.75,58.75 U3.1 | v18,37.75 18,36.5 U2.9
  Bottom 0.15: v150.75,10.5 122,39.25 v112.25,39.25 | 98.75,52.75 92.75,58.75 v92.5,58.75 | 98.75,52.75 v105.25,46.25 | v18,37.75 19.86,37.75 28.68,46.57 28.68,46.79 29.32,47.43 82.47,47.43 85.57,44.32 85.93,44.32 86.18,44.57 86.18,45.93 87.25,47 93,47 98.75,52.75
DN  (via drill 0.3)
  Top 0.15: 165.25,53.75 165,53.5 164.5,53.5 J2.B7 | 165.25,53.75 165.25,54.25 165,54.5 164.5,54.5 J2.A7 | v155.5,54 155.25,53.75 154.5,53.75 D1.4 | 165.25,53.75 v165.5,53.5
  Bottom 0.15: v155.5,54 156,53.5 v165.5,53.5
DP  (via drill 0.3)
  Top 0.15: v163.25,54 164.25,54 J2.A6 | v165.5,54.75 165.25,55 164.5,55 J2.B6 | v153.25,55.5 154.25,55.5 D1.6
  Bottom 0.15: 163.75,54.5 164,54.75 v165.5,54.75 | 163.75,54.5 v163.25,54 | v153.25,55.5 154.25,54.5 163.75,54.5
EPD_3V3
  Top 0.3: J1.16 98.38,14.62 98.75,14.62 J1.15 98.75,14.75 98.75,15.12 102.38,18.75 102.38,25.38 102.75,25.75 102.75,30.62 L1.2 | L1.2 102.88,30.75 102.88,33.75 97.62,33.75 97.5,33.62 95.75,33.62 Q2.2 94.97,33.61 94.25,32.88 87.87,32.88 86.75,34 TP17.TP | C7.1 105.12,30.75 103,30.75 L1.2 | EPD_C5.2 105.12,34.62 103,32.5 L1.2
EPD_3V3_C
  Top 0.3: Q2.1 93.75,33.62 93.75,37.38 R_CL1.1 93.5,37.38 86.75,37.38 TP13.TP 86.62,37.62 86.62,37.75 36,37.75 20.75,53 20.75,53.62 20.5,53.88 U2.18
EPD_BUSY  (via drill 0.3)
  Top 0.15: v101.75,15.5 101.75,14.75 J1.9 | v9.25,56 10.5,54.75 10.5,54 U2.26 10.5,53.75 10.5,53 v31.05,32.45 | TP9.TP 2.95,57.45 v3.05,57.45
  Bottom 0.15: v31.05,32.45 35.32,36.72 35.32,38.93 35.57,39.18 35.93,39.18 36.18,38.93 36.18,27.32 46.42,17.08 100.17,17.08 v101.75,15.5 | v9.25,56 8.25,55 6.58,55 4.3,57.28 3.22,57.28 v3.05,57.45
EPD_CS  (via drill 0.3)
  Top 0.15: v100.25,13.75 100.25,14.5 J1.12 | TP10.TP v109,14 | 20,27.5 20.5,27.5 21.25,28.25 21.5,28.25 23.25,30 R9.2 23.25,30.25 22.75,30.25 v22.25,30.75 | v20.5,35.25 20.5,36.25 U2.11 | 20,27.5 D6.2 | v21,26 20,27 20,27.5
  Bottom 0.15: v109,14 100.5,14 v100.25,13.75 99.75,13.25 99.14,13.25 95.86,16.53 37.92,16.53 35.87,14.47 35.03,14.47 23.5,26 v21,26 | v20.5,35.25 22.25,33.5 v22.25,30.75
EPD_DC  (via drill 0.3)
  Top 0.15: 101.25,12.75 103.5,10.5 114.75,10.5 117,12.75 117.5,12.75 117.75,13 TP11.TP | 101.25,12.75 100.75,13.25 100.75,14.5 J1.11 | v13,35.25 13,36.25 U2.5 | v93.5,14.25 95,12.75 101.25,12.75
  Bottom 0.15: v13,35.25 14.75,33.5 15.89,33.5 21.3,28.09 21.3,26.95 20.86,26.5 20.75,26.5 20.5,26.25 20.5,23.11 29.41,14.2 35.98,14.2 38.03,16.25 91.5,16.25 v93.5,14.25
EPD_RST  (via drill 0.3)
  Top 0.15: 102.75,12.5 104.25,11 111.75,11 113.5,12.75 114.25,12.75 TP12.TP | 102.75,12.5 101.25,14 101.25,14.5 J1.10 | v56.5,13.25 16.75,53 16.75,53.75 U2.21 | 102.75,12.5 v102.5,12.25
  Bottom 0.15: v102.5,12.25 99.36,12.25 97.93,13.68 97.57,13.68 97.14,13.25 v56.5,13.25
FLASH_CS  (via drill 0.3)
  Top 0.15: 25,32.5 25.5,32.5 R5.2 | 25,32.5 21.75,35.75 21.75,36.25 U2.12 21.5,36.5 v21.5,37.75 | v21.25,30.25 18.5,27.5 18,27.5 D9.2 | 25,32.5 v24.75,32.25 | U1.1 50.94,69.44 29.5,48 v29.5,47
  Bottom 0.15: v21.25,30.25 21.5,30 22.5,30 v24.75,32.25 | v29.5,47 | v21.5,37.75 21.5,39 v29.5,47
GDR  (via drill 0.3)
  Top 0.15: v105.25,15.5 105.25,14.75 J1.2 | 90.5,28.5 v91,28 | 90.5,28.5 90.25,28.75 90,28.75 89.5,29.25 81.75,29.25 R4.2 | 90.5,28.5 Q3.1
  Bottom 0.15: v105.25,15.5 103.25,17.5 99.75,17.5 91,26.25 v91,28
GND  (via drill 0.3, 0.35)
  Top 0.3: U4.6 142.75,30.75 143.75,31.75 144.5,31.75 144.5,31.5 144.25,31.25 U4.4 | U2.29_5 13.5,43.75 13.5,44.75 U2.29_6 | v95.5,55.25 96,55.75 C8.1 | v97.75,52.5 97.5,52.5 96.75,51.75 C10_SUPERCAP.1 | v153,54.75 152,54.75 D1.2 | v149,58.75 149,58 C4_USB.2
  Bottom 0.3: v95.5,55.25 95.5,52.5 v97.75,52.5 | v149,58.75 v153,54.75
  other vias: 50,102 53,109 158,14 162,17 164,16 98,16 103,16 109,17 96,43 93,49 152,43 16,69 8,68 48,62 99,48 89,25 21,57.2 12,48 29,28 38,21 60,15 25,22 4.61,57.61 14,31 21,33 18,34 13,34
  pour Top: 90.96,10.06 90.98,10.08 109.02,10.08 109.04,10.06 109.06,10.04 109.08,10.02 109.08,0.08 169.92,0.08 169.92,66.92 91.98,66.92 91.96,66.94 91.94,66.96 91.92,66.98 91.92,110.92 66.08,110.92 66.08,109.98 66.06,109.96 66.04,109.94 66.02,109.92 21.98,109.92 21.96,109.94 21.94,109.96 21.92,109.98 21.92,110.92 0.08,110.92 0.08,0.08 90.92,0.08 90.92,10.02 90.94,10.04
  pour Bottom: 90.96,10.06 90.98,10.08 109.02,10.08 109.04,10.06 109.06,10.04 109.08,10.02 109.08,0.08 169.92,0.08 169.92,66.92 91.98,66.92 91.96,66.94 91.94,66.96 91.92,66.98 91.92,110.92 66.08,110.92 66.08,109.98 66.06,109.96 66.04,109.94 66.02,109.92 21.98,109.92 21.96,109.94 21.94,109.96 21.92,109.98 21.92,110.92 0.08,110.92 0.08,54.41 0.08,54.42 0.11,54.43 6.37,54.43 6.39,54.42 6.41,54.4 6.43,54.37 6.43,36.05 6.41,36.02 6.33,35.94 6.3,35.92 0.08,35.92 0.08,0.08 90.92,0.08 90.92,10.02 90.94,10.04
GPIO8  (via drill 0.3)
  Top 0.15: v23.5,27.25 23.5,25.75 R1.1 | v19.5,35.25 19.25,35.5 19.25,36.25 U2.10
  Bottom 0.15: v23.5,27.25 19.5,31.25 v19.5,35.25
I2C_PW  (via drill 0.3)
  Top 0.15: 158.5,16.25 v158.25,16.25 157.5,16.25 SENSOR2.2 | 158.5,16.25 159.5,15.25 160,15.25 SENSOR2.8 | 158.5,16.25 159.25,17 160,17 SENSOR2.6 | 90,45.75 89,44.75 v85.75,44.75 85,44.75 R1_PINH.1 | 90,45.75 90.5,45.75 R2_PINH.1 | v28.25,46.75 21.75,53.25 21.75,53.75 U2.17 | v94,39.75 94.36,40.11 94.36,43.39 93.67,44.08 90.08,44.08 89.96,44.2 89.96,45.06 90,45.11 90,45.75
  Bottom 0.15: v85.75,44.75 82.75,47.75 29.25,47.75 v28.25,46.75 | v158.25,16.25 157.75,16.75 146,16.75 123,39.75 v94,39.75
INT_RTC  (via drill 0.3)
  Top 0.15: v157,11.25 157,10.5 R1_PINH1.2 | v115.75,46.25 v122.75,39.25 | TP15.TP 87.5,67.5 87.5,66.5 v88,66 88,59 U3.3 | v16.75,37.75 16.75,36.5 U2.8
  Bottom 0.15: v157,11.25 152,16.25 145.75,16.25 v122.75,39.25 | v115.75,46.25 96,66 v88,66 80.21,58.21 18,58.21
  Bottom 0.152: v16.75,37.75 16.75,56.96 18,58.21
IO/BOOT  (via drill 0.3)
  Top 0.15: C6.1 20.5,109 22.25,109 BOOT_BUTTON.4 22.5,109.25 25.75,109.25 BOOT_BUTTON.3 26,109 26.5,109 27.5,108 | 27.5,108 30.75,108 R_BOOT.2 | v25.5,65.5 24.25,64.25 24.25,54 U2.15 | 27.5,108 v27.25,107.75
  Bottom 0.15: v25.5,65.5 27.25,67.25 v27.25,107.75
IO/CHANGE  (via drill 0.3)
  Top 0.15: C10.1 67.5,109 66,109 CHANGE_BUTTON.3 65.75,109.25 62.5,109.25 CHANGE_BUTTON.4 62.25,109 61.5,109 60.25,107.75 v60.25,105 60.25,104.25 R_CHANGE.2 | v27.75,68.5 14.25,55 14.25,54 U2.23
  Bottom 0.15: v27.75,68.5 60.25,101 v60.25,105
MISO  (via drill 0.3)
  Top 0.15: 4.25,92.5 5,92.5 J4.P7 | 4.25,92.5 3.75,93 3.75,97.25 TP6.TP | R8.2 6.5,29.5 6.5,28.75 v7,28.25 7.75,27.5 9.75,27.5 D12.2 | v9.25,55.25 9.25,54 U2.27 | 4.25,92.5 3.25,91.5 3.25,88.25 3.32,88.18 v3.32,87.75 | v47.25,64.69 47.43,64.69 U1.2
  Bottom 0.15: 11.75,57.25 9.75,55.25 v9.25,55.25 9.25,30.5 v7,28.25 | 11.75,57.25 13.75,59.25 42,59.25 46.47,63.72 50.67,63.72 55.57,58.82 55.93,58.82 56.18,59.07 56.18,59.43 51.07,64.54 47.4,64.54 v47.25,64.69 | 11.75,57.25 11.75,57.61 12.28,58.13 12.28,76.58 3.47,85.39 3.47,87.6 v3.32,87.75
MOSI  (via drill 0.3)
  Top 0.15: v3.75,88.5 4,88.25 5,88.25 J4.P3 | v6.75,97.75 5.75,98.75 TP7.TP | v99.25,13.75 99.25,14.5 J1.14 | 18.25,31.75 18,32 18,32.5 R7.2 | 18.25,31.75 v18.5,31.5 | v35.75,38.75 56,59 | 56,59 58.5,61.5 58.5,65.5 U1.5 | 18.25,31.75 14,27.5 13,27.5 D11.2 | v15.75,35 15.5,35.25 15.5,36.25 U2.7 | 56,59 v55.75,59.25
  Bottom 0.15: v35.75,38.75 35.75,14.75 | v15.75,35 18.5,32.25 v18.5,31.5 35.25,14.75 35.75,14.75 | v55.75,59.25 50.74,64.26 24.99,64.26 3.75,85.5 v3.75,88.5 6.75,91.5 6.75,92.86 8.03,94.14 8.03,98.08 7.43,98.68 7.07,98.68 6.82,98.43 6.82,97.82 v6.75,97.75 | 35.75,14.75 37.8,16.8 96.2,16.8 v99.25,13.75
N$1  (via drill 0.3)
  Top 0.15: v155.25,50.5 154.5,50.5 R2-USB1.2 | v165.5,52.75 165.25,53 164.5,53 J2.A5
  Bottom 0.15: v155.25,50.5 157.5,52.75 v165.5,52.75
N$2  (via drill 0.3)
  Top 0.15: v157.25,55 155.25,53 154.25,53 153.25,52 153.25,51.5 R1-USB.1 | v165.5,55.75 165.25,56 164.5,56 J2.B5
  Bottom 0.15: v157.25,55 158,55.75 v165.5,55.75
N$3
  Top 0.15: R1_BAT.2 129.75,54.75 130,54.75 130.5,55.25 132.5,55.25 133.25,54.5 133.75,54.5 MCP73831.1
N$4  (via drill 0.3)
  Top 0.15: v122.25,43.25 123.25,43.25 C1_BAT1.1 | v125.5,43.25 125.75,43.5 126,43.5 | 126,43.5 126.25,43.5 D2.1 126,43.5 | 126,43.5 127,42.5 | 127,42.5 127.75,41.75 129,41.75 IC4.3 | 129,43.5 128,43.5 127,42.5 | 129,43.5 129.25,43.25 132.5,46.5 137.75,46.5 Q1.2 | 129,43.5 IC4.1
  Bottom 0.15: v125.5,43.25 v122.25,43.25
N$5
  Top 0.15: CHG_LED.C 124.75,56.25 126.25,56.25 128.25,54.25 128.5,54.5 R1_BAT.1
N$6  (via drill 0.3)
  Top 0.15: v101.75,25.25 101.75,26 C4.1 | v114.5,21.75 115.25,21 D4.1 | v107,37.25 107,38 D3.2
  Bottom 0.15: 103.25,23.75 104.25,22.75 113.5,22.75 v114.5,21.75 | 103.25,23.75 v101.75,25.25 | v107,37.25 103.25,33.5 103.25,23.75
N$7
  Top 0.15: R2_BAT.2 132.25,52.25 132.25,54.25 132,54.5 131.5,54.5 MCP73831.5
N$8
  Top 0.15: J1.5 103.75,14.75 103.75,15.25 107.25,18.75 109.75,18.75 EPD_C2.2
N$9
  Top 0.15: J1.20 96.25,14.75 96.25,15.25 92,19.5 92.25,19.75 EPD_C8.2
N$10
  Top 0.15: J1.24 94.25,14.75 88.75,14.75 84.25,19.25 EPD_C12.2
N$11
  Top 0.15: J1.4 104.25,14.75 104.25,15.25 107,18 110.75,18 111.5,18.75 EPD_C1.2
N$12
  Top 0.15: J1.22 95.25,14.75 95.25,15.25 92.25,18.25 89.75,18.25 88.75,19.25 88.25,19.25 EPD_C10.2
N$13
  Top 0.15: IC1.5 46.75,100.5 47.25,100.5 49,98.75 49.5,98.75 C_DELAY.1
N$14  (via drill 0.3)
  Top 0.15: v95.5,58 96,58 R_CAPACITOR.1 | v93.5,60.5 92.75,61.25 93,61.5 D7.1
  Bottom 0.15: v95.5,58 93.5,60 v93.5,60.5
N$15
  Top 0.15: J1.21 95.75,14.75 95.75,15.25 92.25,18.75 91.75,18.75 91.5,19 91.5,20.25 91,20.75 90.5,20.75 EPD_C9.2
N$19
  Top 0.15: J1.19 96.75,14.75 96.75,17.75 95.5,19 95.5,19.5 EPD_C7.2
N$20  (via drill 0.3)
  Top 0.15: v100,18 99,18 97.25,16.25 97.25,14.75 J1.18 | v102.5,18 102.75,18.25 103.25,18.25 EPD_C6.2
  Bottom 0.15: v102.5,18 v100,18
PREVGL  (via drill 0.3)
  Top 0.15: 94.25,15.75 92.25,17.75 87.5,17.75 86,19.25 EPD_C11.2 | 94.25,15.75 94.75,15.25 94.75,14.75 J1.23 | v114.5,17.5 115.25,17.5 D4.2 | 94.25,15.75 v94.25,15.5
  Bottom 0.15: v114.5,17.5 109.75,12.75 99.25,12.75 96.5,15.5 v94.25,15.5
RESE  (via drill 0.3)
  Top 0.15: 108.25,14.25 112.5,18.5 112.5,27.75 R3.2 | 108.25,14.25 107.75,13.75 105,13.75 104.75,14 104.75,14.5 J1.3 | v92.5,27.5 91.75,28.25 Q3.2 | 108.25,14.25 v108,14.5
  Bottom 0.15: v92.5,27.5 101.5,18.5 104,18.5 v108,14.5
RESE'  (via drill 0.3)
  Top 0.15: 84.25,15.25 84.25,11.75 R2.2 | 84.25,15.25 84.5,15.5 SJ1.2 84.25,15.25 | v109.75,29 112.25,29 R3.1 | 84.25,15.25 84.25,16.5 v85.25,17.5 v85.25,17.51
  Bottom 0.15: v85.25,17.51 85.25,23 90.75,28.5 97.64,28.5 106.82,37.68 107.18,37.68 107.43,37.43 107.43,37.07 105.53,35.17 105.53,33.22 v109.75,29
RESET  (via drill 0.3)
  Top 0.15: C5.1 45.25,109 v46,109 47.25,109 RESET_BUTTON.4 47.5,109.25 50.75,109.25 RESET_BUTTON.3 | 44.75,100.75 45.25,100.75 50.25,105.75 53.25,105.75 R_RESET.2 | 44.75,100.75 44,100.75 IC1.1 | v10.5,37.75 10.5,36.5 U2.3 | v27.75,69.25 v17.25,58.75 | 44.75,100.75 v44.75,100.5
  Bottom 0.15: v10.5,37.75 16.25,43.5 16.25,57.75 v17.25,58.75 | v27.75,69.25 44.75,86.25 v44.75,100.5 44.75,107.75 v46,109
RTC_RST  (via drill 0.3)
  Top 0.15: v23,55.25 23,54 U2.16 | v86.5,57.25 86.75,57.5 86.75,58.75 U3.4
  Bottom 0.15: v86.5,57.25 79.64,57.25 78.86,56.47 24.22,56.47 v23,55.25
RX  (via drill 0.3)
  Top 0.15: v10.5,56.75 12.75,54.5 12.75,54 U2.24 | v3.25,62.5 2.75,63 2,63 TP2.TP
  Bottom 0.15: v3.25,62.5 3.25,60 6.5,56.75 v10.5,56.75
SCK  (via drill 0.3)
  Top 0.15: v97.75,13.25 99.5,13.25 99.75,13.5 99.75,14.5 J1.13 | v16.75,26.75 16,27.5 D10.2 | v3.75,90.25 5,90.25 J4.P5 | v7.25,98.25 8,99 8.5,99 TP8.TP | 14.75,34.75 14,35.5 14,36.25 U2.6 | 14.75,34.75 15.25,34.25 16,34.25 R6.2 | v36,44.25 58.5,66.75 U1.6 | 14.75,34.75 v15,35 | v11.75,56.5 v11,57.25
  Bottom 0.15: v7.25,98.25 7.75,97.75 7.75,94.25 v3.75,90.25 2.5,89 2.5,86.97 3.2,86.27 3.2,85.27 12,76.47 12,58.25 v11,57.25 | v36,44.25 29.75,44.25 21.25,35.75 15.75,35.75 | v15,35 15.75,35.75 | v11.75,56.5 10,54.75 10,35.75 11.5,35.75 | 15.75,35.75 11.5,35.75 | 11.5,35.75 11.5,32 v16.75,26.75 16.75,26.47 30.84,12.38 96.88,12.38 v97.75,13.25
SCL  (via drill 0.3)
  Top 0.15: U4.7 141.75,30.25 141.5,30 141.5,29.5 v142.25,28.75 153.25,17.75 157.25,17.75 SENSOR2.4 157.5,17.75 158,17.75 160.68,20.43 164.75,20.43 J3.4 | v93.5,46.5 90.75,49.25 U3.16 90.5,49.5 90.5,50 v89,51.5 | R2_PINH.2 90.75,44.75 v91.5,45.5 v92.49,44.51 v92.5,44.51 | U2.20 18,53.75 18,53.18 v18.43,52.75
  Bottom 0.15: v91.5,45.5 92.5,46.5 v93.5,46.5 | v89,51.5 87.75,52.75 v18.43,52.75 | v142.25,28.75 126.5,44.5 v92.51,44.5 v92.5,44.51
SDA  (via drill 0.3)
  Top 0.15: v147.75,24 v143,28.75 142.25,29.5 142.25,29.75 U4.8 | v156.25,17.25 156.5,17 157.25,17 SENSOR2.3 157.5,17 158,17 161,20 165.25,20 J3.3 | v87.25,47.75 85.5,46 85,46 R1_PINH.2 | v88.5,48 88.5,48.5 89.25,49.25 U3.15 89.5,49.25 89.5,48.75 93,45.25 v93.5,45.25 | v19.25,52.25 19.25,53.75 U2.19
  Bottom 0.15: v147.75,24 154.5,17.25 v156.25,17.25 | v88.5,48 87.5,48 v87.25,47.75 85.97,49.03 22.47,49.03 v19.25,52.25 | v143,28.75 126.5,45.25 v93.5,45.25
SRC
  Top 0.15: C4.2 100.25,26.25 98.5,28 98.5,30.5 L1.1 98.25,30.5 91.25,30.5 Q3.3 91,30.5 79.75,30.5 79.5,30.25 79.5,28.75 80.25,28 80.25,27.5 D5.2
SS_SD  (via drill 0.3)
  Top 0.15: v12,33 11.25,33 R10.2 | v12,35.25 11.75,35.5 11.75,36.25 U2.4 11.55,37.31 9.25,39.61 9.25,51.25 v8.75,51.75 | v2.75,85.25 4.25,86.75 5.25,86.75 J4.P2 | v20.88,27.13 21,27.25 21.87,27.25 D8.2
  Bottom 0.15: v12,35.25 v12,33 16,33 20.88,28.13 v20.88,27.13 | v2.75,85.25 2.75,57.75 2.62,57.62 2.62,57.27 2.89,57 4.06,57 8.75,52.31 v8.75,51.75
TX  (via drill 0.3)
  Top 0.15: v10,56.25 11.5,54.75 11.5,54 U2.25 | v3.18,59.25 3,59.25 1.91,60.34 TP1.TP
  Bottom 0.15: v10,56.25 9.78,56.47 6.38,56.47 3.61,59.25 v3.18,59.25
USB_D+  (via drill 0.3)
  Top 0.15: v150.75,55.5 151.75,55.5 D1.1 | v25,37.75 24.25,37 24.25,36.5 U2.14
  Bottom 0.15: v150.75,55.5 141,45.75 92.5,45.75 86.5,39.75 32,39.75 30,37.75 v25,37.75
USB_D-  (via drill 0.3)
  Top 0.15: v151.75,53 151.75,53.5 D1.3 | U2.13 23,36.5 23,36.89 v23.8,37.7
  Bottom 0.15: v151.75,53 145.5,46.75 145.5,17.75 123,40.25 87.5,40.25 86.7,39.45 32.2,39.45 30,37.25 24.25,37.25 v23.8,37.7
VBAT
  Top 0.3: 133.94,60.44 136.38,62.88 136.38,64.62 TP3.TP | 133.94,60.44 133.62,60.12 C2_BAT.1 | U4.2 144.12,30.25 144.12,30.75 U4.3 145,30.75 145,37.75 138.88,43.88 138.88,44.5 Q1.3 138.75,44.62 138.62,44.75 138.62,52.5 134.94,56.19 | 134.94,56.19 134.62,56.5 134,56.5 MCP73831.3 | 133.94,60.44 135,59.38 135,56.25 134.94,56.19
VBUS
  Top 0.3: 155.5,56.62 155.5,55.12 155,54.62 154.5,54.62 D1.5 | 155.5,56.62 155.5,58 156.62,58 C5_USB.1 | 139.75,46.62 139.06,45.94 140.66,44.34 147.09,44.34 149.16,46.42 150.9,46.42 152.97,44.34 PFMF.050.1.2 | 148.75,55.62 139.75,46.62 | 148.75,55.62 148.75,56.62 C4_USB.1 148.88,56.62 155.5,56.62 | 139.75,46.62 Q1.1 | 125.81,41.44 126,41.62 126.25,41.62 126.25,41.5 D2.2 | 125.81,41.44 124.62,40.25 124.62,39.5 R1_PWRUSB.2 | 123.25,56.5 124.5,57.75 CHG_LED.A 124.62,57.75 130,57.75 | 123.25,56.5 120.12,56.5 120.12,56.38 C1_BAT.1 120,56.5 120,57.75 118.12,59.62 TP14.TP | 130,57.75 131.25,56.5 MCP73831.4 | 123.25,56.5 123.25,56.25 124.44,55.06 124.44,42.81 125.81,41.44 | 130,57.75 130,60.02 136.28,66.3 143.94,66.3 149.56,60.69 149.56,56.43 148.75,55.62
VBUS1
  Top 0.3: C2.1 154.73,22.37 157.78,22.37 C1.1
VRTC
  Top 0.3: C10_SUPERCAP.2 96.75,54 97.62,54.88 97.62,55.88 C8.2 97.62,56 97.62,57.75 R_CAPACITOR.2 97.5,57.88 97.5,58.75 94.25,58.75 92.12,60.88 92.12,62.38 90.38,62.38 88.62,60.62 88.62,57.5 88.12,57 88.12,49.62 88,49.5 U3.14
VUSB
  Top 0.3: J2.A4 164.38,51.75 164.38,52 J2.B9 164.35,52.12 163.73,52.12 162.85,53 161.5,53 | J2.A9 164.38,56.75 164.38,56.62 J2.B4 164.25,56.62 163.62,56.62 163.38,56.38 163.38,54.88 161.5,53 | 161.5,53 155.75,47.25 155.75,42.38 155.5,42.12 150.12,42.12 150.12,44.25 PFMF.050.1.1